# Altium PCB MagControl.PcbDoc (part 1 of 2)
Units mil, origin at the board's own origin, x right, y up, seen from the top; angles counter-clockwise.
Board outline 3700 x 2900 mil, 4 copper layers (Top Layer, Layer 1, Layer 2, Bottom Layer), stack 61.756 mil thick; 68 components, 51 nets, 337 pads, 112 vias.
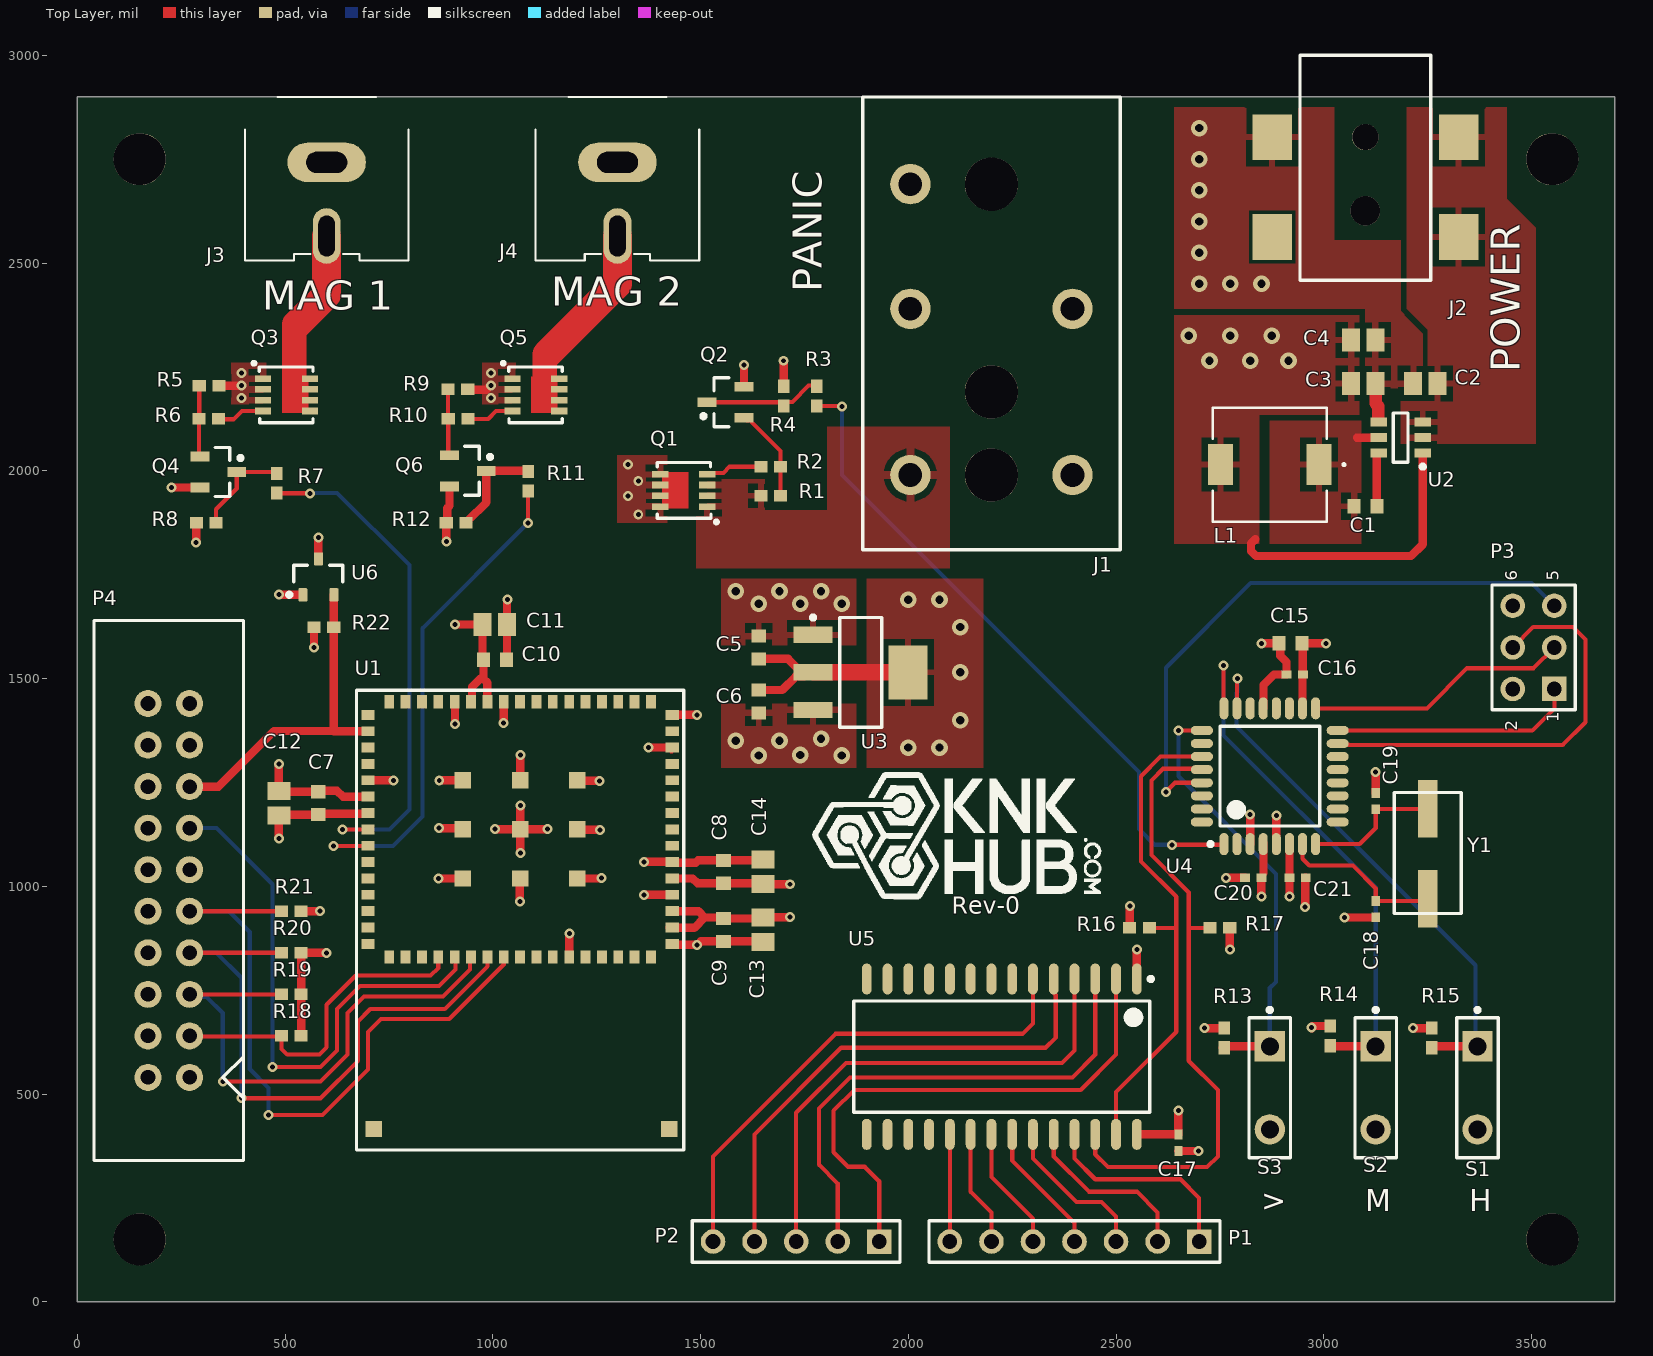
[diagram p0: Top Layer view]
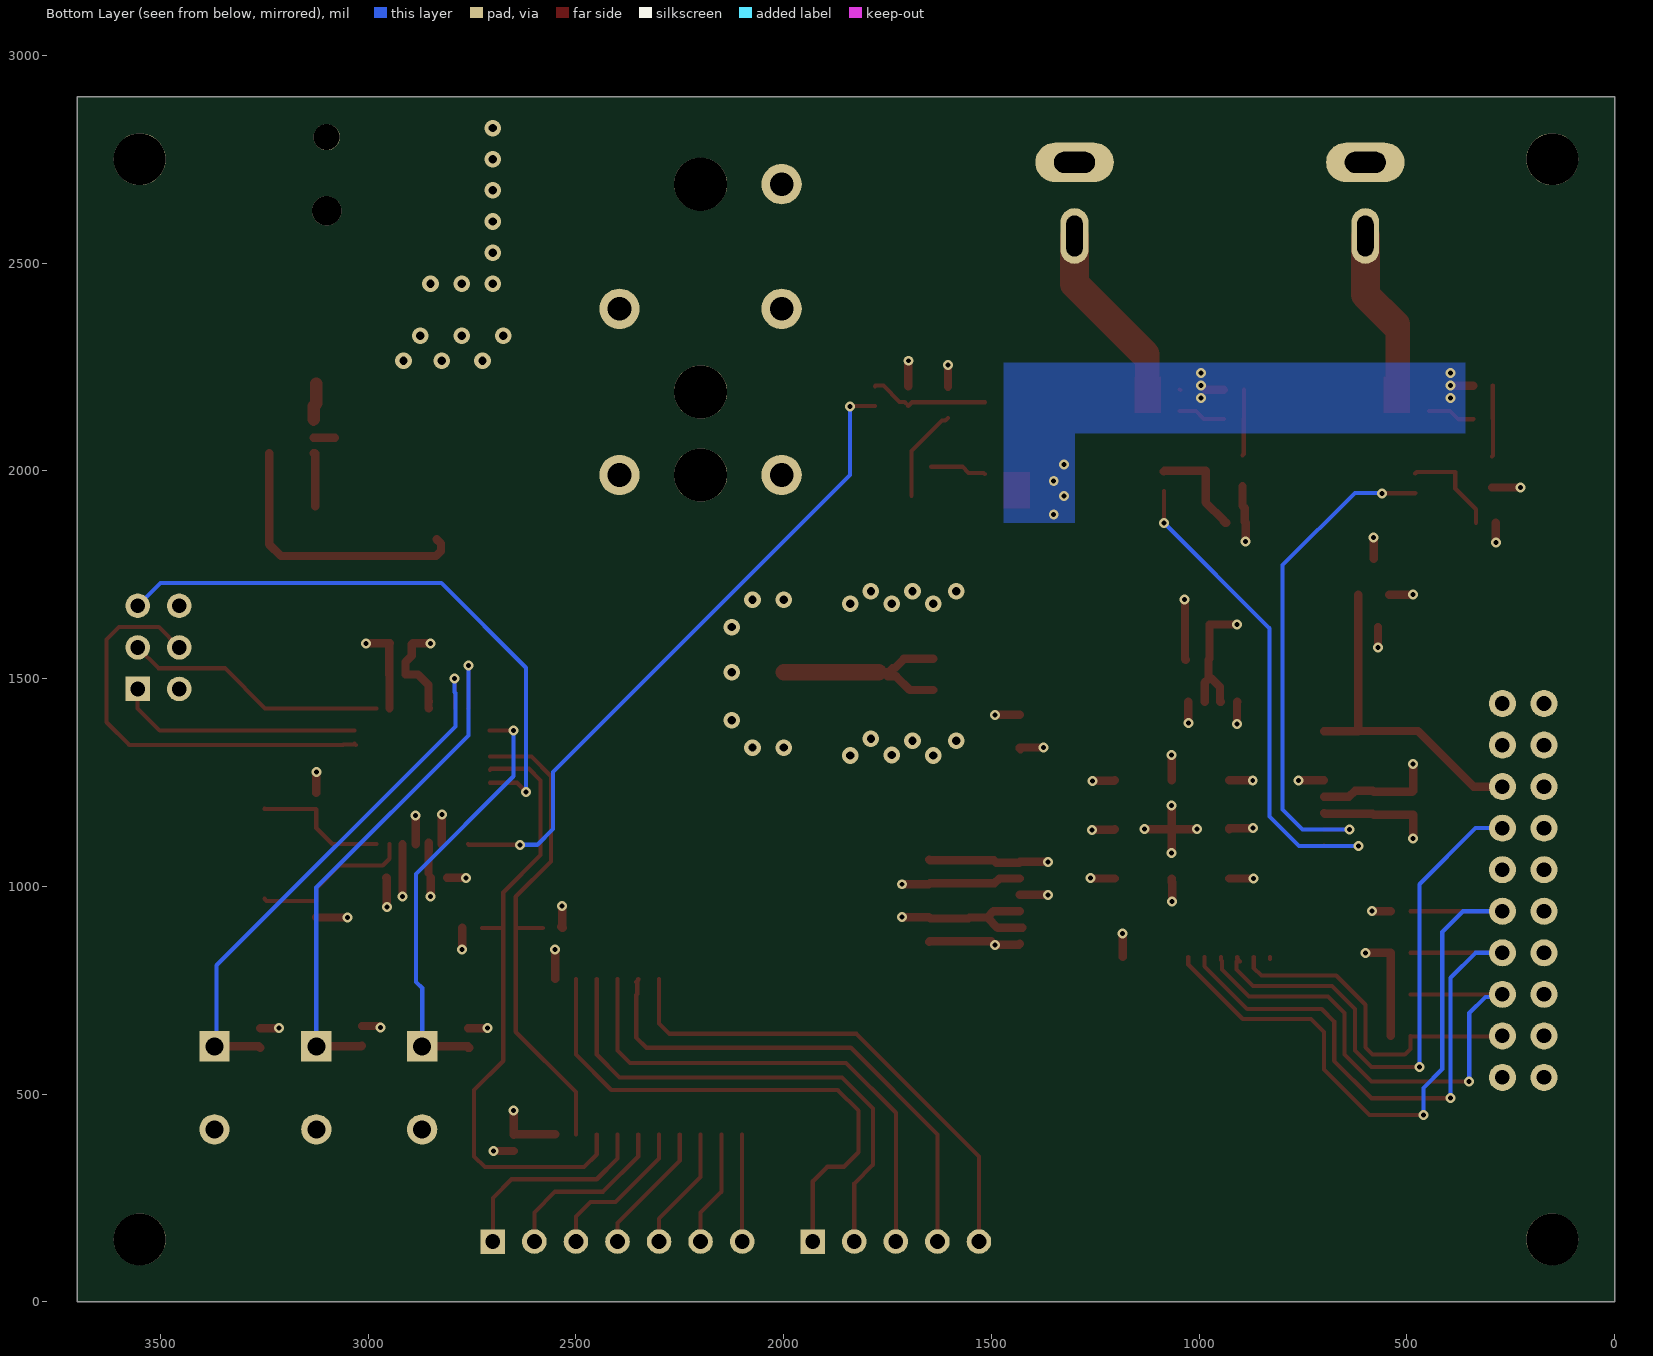
[diagram p1: Bottom Layer view, seen from below]
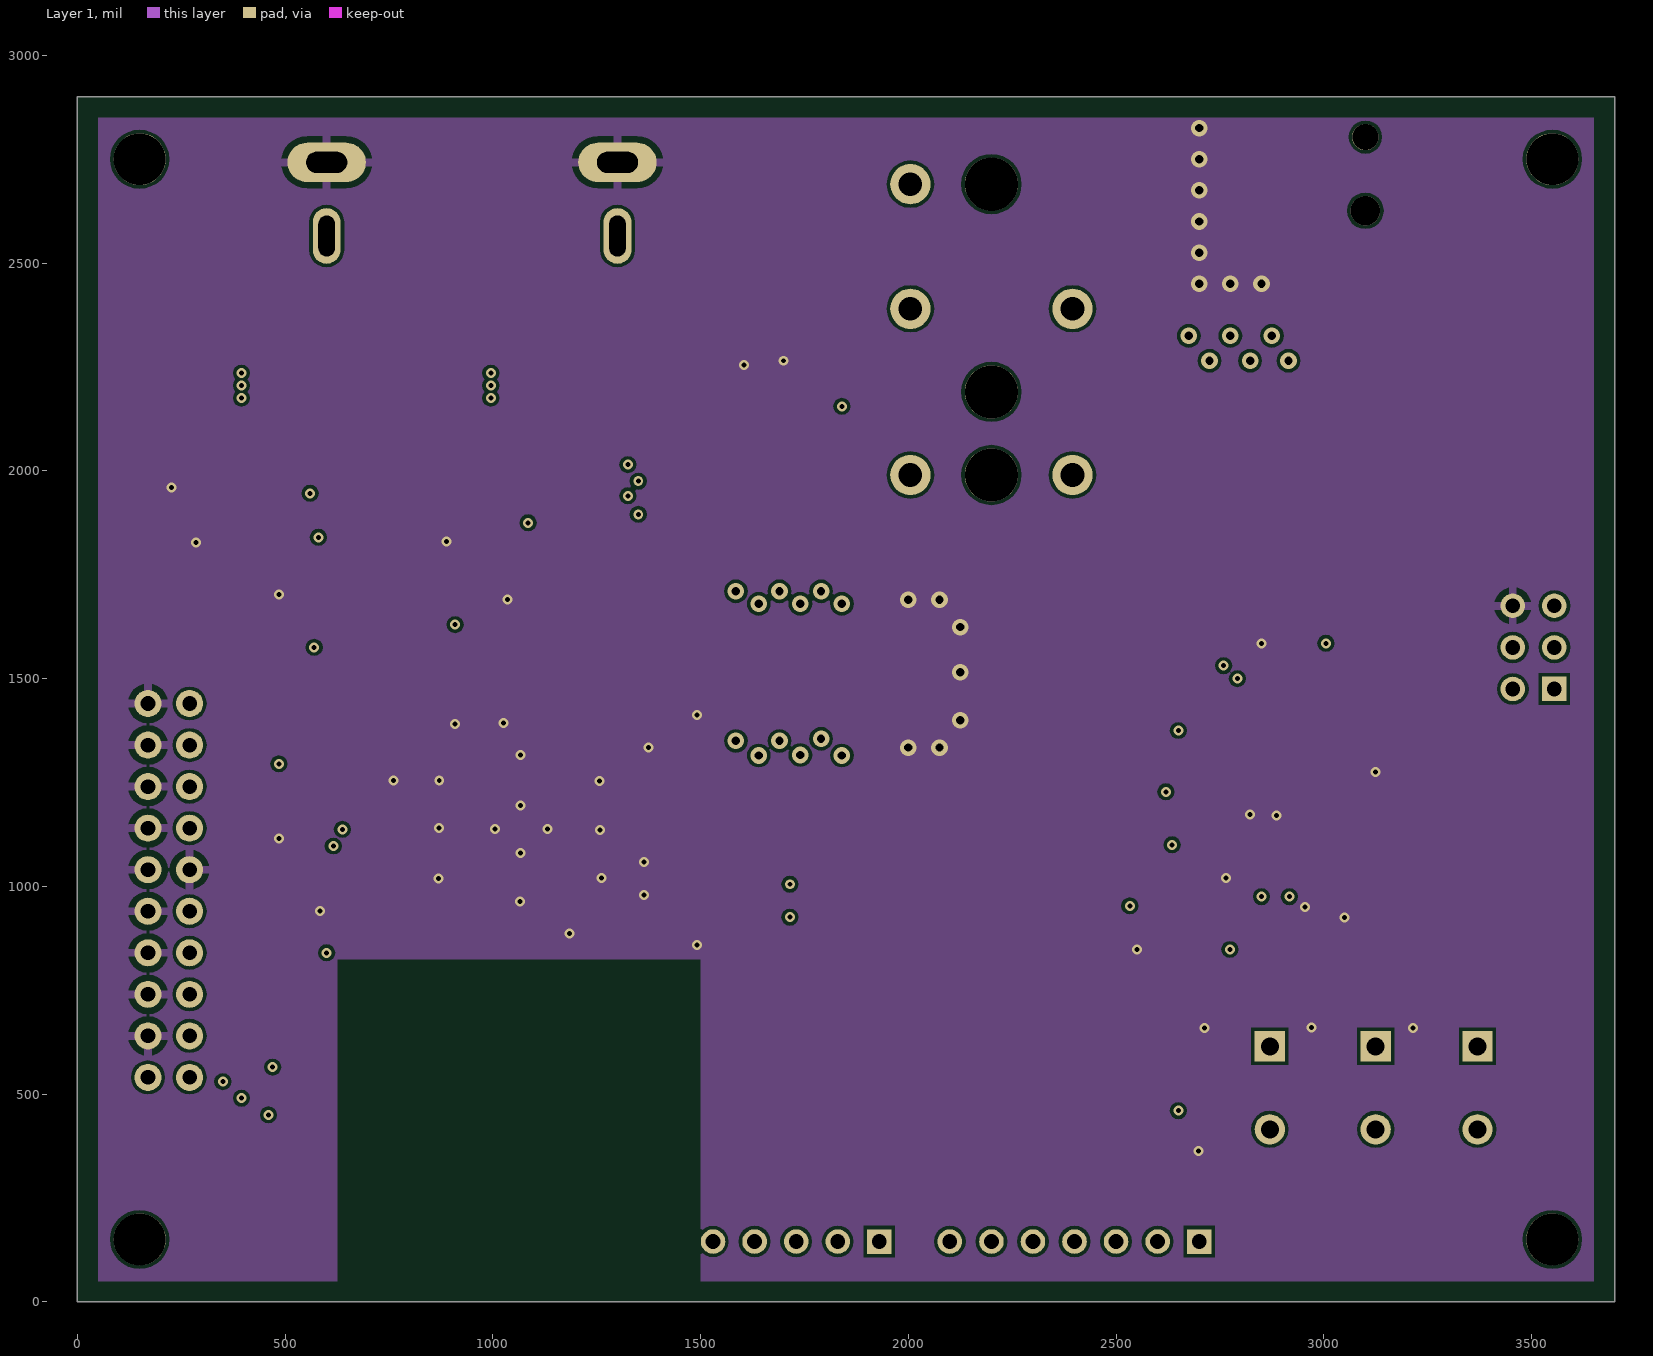
[diagram p2: Layer 1]
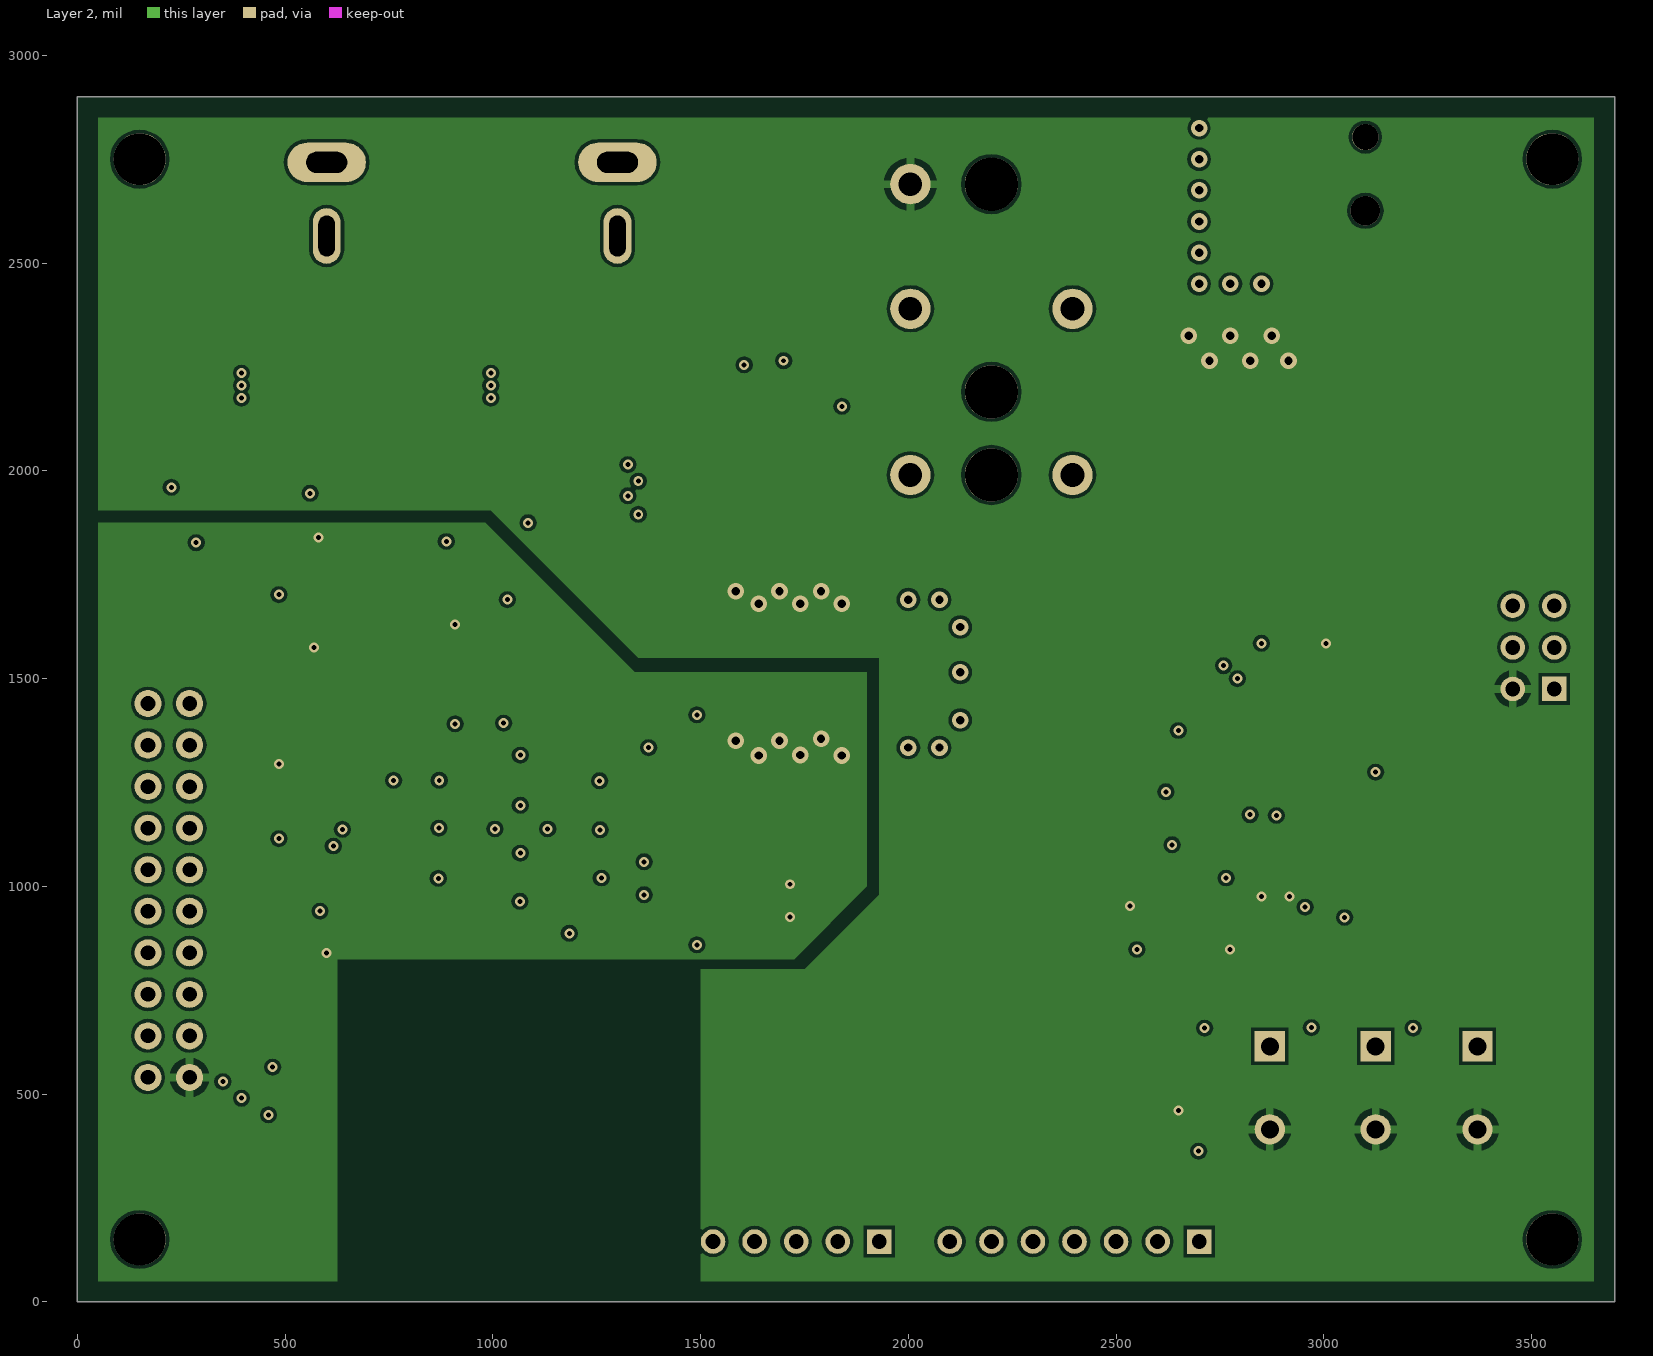
[diagram p3: Layer 2]
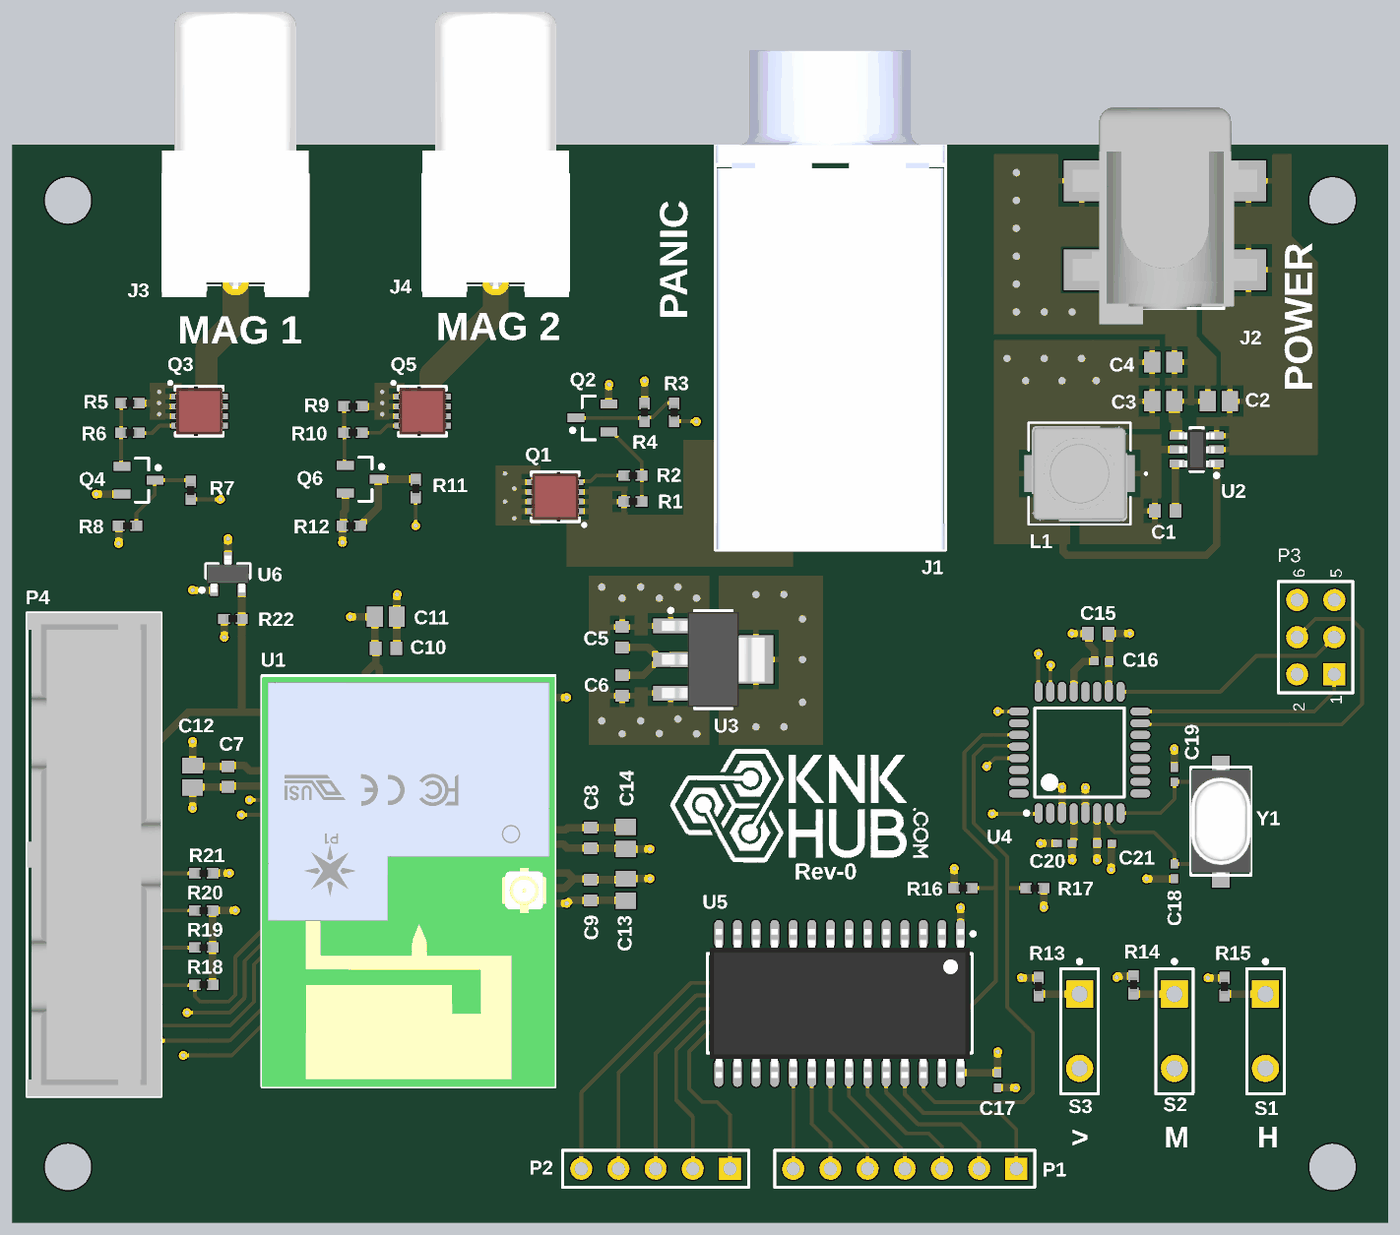
[diagram p4: 3D render of the assembled board from above, using the file's embedded part models]

## Layer stack, top to bottom
Top Solder: solder mask 0.4, Solder Resist, Dk 3.5
Top Layer: signal copper 1.4
Dielectric 2: prepreg 14, PP-006, Dk 4.1
Layer 1: signal copper 1.3779
Dielectric 1: dielectric 28.2, FR-4, Dk 4.8
Layer 2: signal copper 1.3779
Dielectric 3: prepreg 14, PP-006, Dk 4.1
Bottom Layer: signal copper 1.4
Bottom Solder: solder mask 0.4, Solder Resist, Dk 3.5

## Board outline
0,0 0,2900 3700,2900 3700,0

## Design rules (kind name [scope] priority, off if disabled: settings)
Clearance [All] p1: gap=8 ignorepadtopadclearanceinfootprint=FALSE except(0: Arc-Hole Track-Hole SMDPad-Hole THPad-Hole Via-Hole Fill-Hole Poly-Hole Region-Hole Text-Hole)
PlaneClearance [All] p1: clearance=30
PolygonConnect [All] p1: thpad.connectstyle=Relief thpad.reliefconductorwidth=20 thpad.reliefentries=4 thpad.polygonreliefangle="90 Angle" thpad.airgapwidth=15 smdpad.connectstyle=Relief smdpad.reliefconductorwidth=15 smdpad.reliefentries=4 smdpad.polygonreliefangle="90 Angle" smdpad.airgapwidth=15 via.connectstyle=Direct via.reliefconductorwidth=20 via.reliefentries=4 via.polygonreliefangle="90 Angle" via.airgapwidth=10
RoutingVias [All] p1: holewidth=12 width=24 viastyle="Through Hole" minholewidth=12 minwidth=24 maxholewidth=20 maxwidth=40
SolderMaskExpansion [All] p1: expansion=4
Width [All] p1: maxlimit=100 minlimit=10 preferedwidth=10
29 further rules are at their usual default settings.

## Classes and differential pairs
component class SCH_MagControl_Sheet2: C15 C16 C17 C18 C19 C20 C21 P1 P2 P3 R13 R14 R15 R16 R17 S1 S2 S3 U4 U5 Y1
component class SCH_MagControl_Sheet1: C1 C2 C3 C4 C5 C6 C7 C8 C9 C10 C11 C12 C13 C14 J1 J2 J3 J4 L1 P4 Q1 Q2 Q3 Q4 Q5 Q6 R1 R2 R3 R4 R5 R6 R7 R8 R9 R10 R11 R12 R18 R19 R20 R21 R22 U1 U2 U3 U6

## Components (designator, comment, footprint, x,y, rotation, side; value= is the part's Value field where it differs from the comment)
C1 "" CAPC1608L 3100,1915 r0 top value=100nF
C2 "" CAPC2012L 3244.53,2210 r0 top value=10uF
C3 "" CAPC2012L 3095,2210 r180 top value=10uF
C4 "" CAPC2012L 3095,2315 r180 top value=22uF
C5 "" CAPC1608L 1640,1575 r90 top value=10uF
C6 "" CAPC1608L 1640,1445 r270 top value=10uF
C7 "" CAPC1608L 580,1200 r90 top value=10uF
C8 "" CAPC1608L 1555,1035 r270 top value=10uF
C9 "" CAPC1608L 1555,895 r90 top value=10uF
C10 "" CAPC1608L 1005,1545 r180 top value=10uF
C11 "" CAPC2012L 1004.53,1630 r180 top value=0.1uF
C12 "" CAPC2012L 485,1200 r90 top value=0.1uF
C13 "" CAPC2012L 1650,895.47 r90 top value=0.1uF
C14 "" CAPC2012L 1650,1035 r270 top value=0.1uF
C15 "" CAPC1608L 2920,1585 r0 top value=10uF
C16 "" CAPC1005L 2930,1510 r0 top value=0.1uF
C17 "" CAPC1005L 2650,382.68 r90 top value=0.1uF
C18 "" CAPC1005L 3125,945.31 r90 top value=18pF
C19 "" CAPC1005L 3125,1205 r270 top value=18pF
C20 "" CAPC1005L 2830,1020.55 r0 top value=0.1uF
C21 "" CAPC1005L 2936.93,1020.55 r180 top value=0.1uF
J1 "" SN37A12 2200,2690 r90 top locked value=PHONO
J2 "" PJ-002B-SMT 2922.83,3000 r270 top locked
J3 "" CUI_RCJ-043 600,2900 r90 top locked value=RCJ-043
J4 "" CUI_RCJ-043 1300,2900 r90 top locked value=RCJ-043
L1 "" IND_BOURNS_SRR06 2870,2015 r180 top value=SRR0604-4R7ML
P1 "" HDR1X7 2700,145 r180 top locked
P2 "" HDR1X5 1930,145 r180 top locked
P3 "" HDR2X3 3555,1475 r90 top value="Header 3X2"
P4 "" C-5103308-5 270,540 r270 top locked value="Header 10x2"
Q1 "" "POWER-PAK 1212-8" 1516,1914 r180 top value=SQS423EN
Q2 "" SOT23_N 1560,2165 r180 top value=PMBT2222A
Q3 "" "POWER-PAK 1212-8" 447,2222 r0 top value=SQS423EN
Q4 "" SOT23_N 339.29,1997.4 r0 top value=PMBT2222A
Q5 "" "POWER-PAK 1212-8" 1047,2222 r0 top value=SQS423EN
Q6 "" SOT23_N 940,2000 r0 top value=PMBT2222A
R1 "" RESC1005N 1668.62,1940 r180 top value=10.0K
R2 "" RESC1005N 1668.62,2010 r180 top value=12.0K
R3 "" RESC1005N 1780,2180 r90 top value=1.00K
R4 "" RESC1005N 1700,2180 r270 top value=10.0K
R5 "" RESC1005N 317,2205 r0 top value=10.0K
R6 "" RESC1005N 316.38,2125 r0 top value=12.0K
R7 "" RESC1005N 480,1970 r90 top value=1.00K
R8 "" RESC1005N 310,1875 r0 top value=10.0K
R9 "" RESC1005N 916,2196 r0 top value=10.0K
R10 "" RESC1005N 916.38,2125 r0 top value=12.0K
R11 "" RESC1005N 1085,1975 r90 top value=1.00K
R12 "" RESC1005N 911.38,1875 r0 top value=10.0K
R13 "" RESC1005N 2760,635 r270 top value=10.0K
R14 "" RESC1005N 3015,640 r270 top value=10.0K
R15 "" RESC1005N 3260,635 r270 top value=10.0K
R16 "" RESC1005N 2556.38,900 r180 top value=10.0K
R17 "" RESC1005N 2750,900 r0 top value=10.0K
R18 "" RESC1005N 515,640 r0 top value=10.0K
R19 "" RESC1005N 515,740 r0 top value=10.0K
R20 "" RESC1005N 515,840 r0 top value=10.0K
R21 "" RESC1005N 515,940 r0 top value=10.0K
R22 "" RESC1005N 593.38,1624 r180 top value=10.0K
S1 "\"H\"" SPST-2 3370,515 r270 top
S2 "\"M\"" SPST-2 3125,515 r270 top
S3 "\">\"" SPST-2 2870,515 r270 top
U1 "" PARTICLE_P1 1431.77,861.5 r90 top value="Particle P1"
U2 "" TSOT26-6N 3185,2080 r180 top value=AP63205
U3 "" SOT223-4N 1885,1515 r0 top value=LM3940
U4 "" 32A_L 2870,1265 r90 top value=ATmega328P-AU
U5 "" SOP127P1030X264-28N 2225,590 r270 top value=HT16K33
U6 "" DBZ0003A_L 580,1745 r90 top value=TLV803SDBZR
Y1 "" CSM-3X 3250,1078.27 r90 top value=16MHz

## Footprints (in the part's own frame and the unit in brackets; to place one, negate y for a bottom-side part, rotate by r counter-clockwise, add the part's x,y. Pads: shape width x height; smd on the part's side, far side on the other; paste and mask are expansions set on the pad)
32A_L [mm] "Thin QFP, 32-Leads, Body 7x7mm, Pitch 0.8mm, IPC High Density"
  oval 1.35x0.55 smd: 1(-4.15,2.8) 2(-4.15,2) 3(-4.15,1.2) 4(-4.15,0.4) 5(-4.15,-0.4) 6(-4.15,-1.2) 7(-4.15,-2) 8(-4.15,-2.8) 17(4.15,-2.8) 18(4.15,-2) 19(4.15,-1.2) 20(4.15,-0.4) 21(4.15,0.4) 22(4.15,1.2) 23(4.15,2) 24(4.15,2.8)
  oval 0.55x1.35 smd: 9(-2.8,-4.15) 10(-2,-4.15) 11(-1.2,-4.15) 12(-0.4,-4.15) 13(0.4,-4.15) 14(1.2,-4.15) 15(2,-4.15) 16(2.8,-4.15) 25(2.8,4.15) 26(2,4.15) 27(1.2,4.15) 28(0.4,4.15) 29(-0.4,4.15) 30(-1.2,4.15) 31(-2,4.15) 32(-2.8,4.15)
  silkscreen extent -4.27,-3.05 3.05,3.75, body extent -3.5,-3.5 3.5,3.5, height 1.2
C-5103308-5 [mil] "CONN HEADER VERT 20POS 2.54MM"
  round 65 hole 35: 1(0,0) 2(0,-100) 3(-100,0) 4(-100,-100) 5(-200,0) 6(-200,-100) 7(-300,0) 8(-300,-100) 9(-400,0) 10(-400,-100) 11(-500,0) 12(-500,-100) 13(-600,0) 14(-600,-100) 15(-700,0) 16(-700,-100) 17(-800,0) 18(-800,-100) 19(-900,0) 20(-900,-100)
  silkscreen extent -1100,-230 200,130, body extent -1100,-230 200,130, height 388
CAPC1005L [mm] "Chip Capacitor, Body 1.0x0.5mm, IPC High Density"
  rect 0.6x0.5 smd: 1(-0.5,0) 2(0.5,0)
  body extent -0.55,-0.3 0.55,0.3, height 0.6
CAPC1608L [mm] "Chip Capacitor, Body 1.6x0.8mm, IPC High Density"
  rect 0.8x0.9 smd: 1(-0.7,0) 2(0.7,0)
  body extent -0.87,-0.48 0.87,0.48, height 0.85
CAPC2012L [mm] "Chip Capacitor, Body 2.0x1.3mm, IPC High Density"
  rect 1.1x1.4 smd: 1(-0.75,0) 2(0.75,0)
  body extent -1.1,-0.72 1.1,0.72, height 1.1
CSM-3X [mm]
  rect 3.5x1.2 smd: 1(-2.75,0) 2(2.75,0)
  silkscreen extent -3.64,-2.05 3.74,2.05, body extent -3.75,-2.05 3.85,2.05, height 2.3
CUI_RCJ-043 [mm]
  oval 2.4x4.8 hole 1.3 slot 2.5 at 90 deg: 1(-4,0)
  oval 3.4x1.7 hole 1 slot 2.5 at 0 deg: 2(-8.5,0)
  silkscreen extent -10,-5 0,5, body extent -10.41,-5 9.09,5, height 13.01
DBZ0003A_L [mm] "SOT23, 3-Leads, Body 3.04x1.4mm, Pitch 0.95mm, IPC High Density"
  rrect18% 0.8x0.55 smd: 1(-1.1,0.95) 2(-1.1,-0.95) 3(1.1,0)
  silkscreen extent -1.22,-1.5 0.7,1.9, body extent -1.26,-1.46 1.26,1.46, height 0.96
HDR1X5 [mm] "Connector; Header; 5 Position"
  rect 1.5x1.5 hole 0.9: 1(0,0)
  round 1.5 hole 0.9: 2(2.54,0) 3(5.08,0) 4(7.62,0) 5(10.16,0)
  silkscreen extent -1.27,-1.27 11.43,1.27
HDR1X7 [mm] "Connector; Header; 7 Position"
  rect 1.5x1.5 hole 0.9: 1(0,0)
  round 1.5 hole 0.9: 2(2.54,0) 3(5.08,0) 4(7.62,0) 5(10.16,0) 6(12.7,0) 7(15.24,0)
  silkscreen extent -1.27,-1.27 16.51,1.27
HDR2X3 [mm] "Connector; Header; 3x2 Position"
  rect 1.5x1.5 hole 0.9: 1(0,0)
  round 1.5 hole 0.9: 2(0,2.54) 3(2.54,0) 4(2.54,2.54) 5(5.08,0) 6(5.08,2.54)
  silkscreen extent -1.27,-1.27 6.35,3.81
IND_BOURNS_SRR06 [mil]
  rect 60x99 smd paste+0 mask+0: 1(-118.5,0) 2(118.5,0)
  silkscreen extent -182,-137 137,137, body extent -128,-128 128,128, height 182
PARTICLE_P1 [mm]
  rect 0.6x0.8 smd: 1(0,0) 2(1,0) 3(2,0) 4(3,0) 5(4,0) 6(5,0) 7(6,0) 8(7,0) 9(8,0) 10(9,0) 11(10,0) 12(11,0) 13(12,0) 14(13,0) 15(14,0) 33(14,18.6) 34(13,18.6) 35(12,18.6) 36(11,18.6) 37(10,18.6) 38(9,18.6) 39(8,18.6) 40(7,18.6) 41(6,18.6) 42(5,18.6) 43(4,18.6) 44(3,18.6) 45(2,18.6) 46(1,18.6) 47(0,18.6)
  rect 0.8x0.6 smd: 16(14.8,1.3) 17(14.8,2.3) 18(14.8,3.3) 19(14.8,4.3) 20(14.8,5.3) 21(14.8,6.3) 22(14.8,7.3) 23(14.8,8.3) 24(14.8,9.3) 25(14.8,10.3) 26(14.8,11.3) 27(14.8,12.3) 28(14.8,13.3) 29(14.8,14.3) 30(14.8,15.3) 31(14.8,16.3) 32(14.8,17.3) 48(-0.8,17.3) 49(-0.8,16.3) 50(-0.8,15.3) 51(-0.8,14.3) 52(-0.8,13.3) 53(-0.8,12.3) 54(-0.8,11.3) 55(-0.8,10.3) 56(-0.8,9.3) 57(-0.8,8.3) 58(-0.8,7.3) 59(-0.8,6.3) 60(-0.8,5.3) 61(-0.8,4.3) 62(-0.8,3.3) 63(-0.8,2.3) 64(-0.8,1.3)
  rect 1x1 smd: 65(4,5.8) 66(7,5.8) 67(10,5.8) 68(4,9.3) 69(7,9.3) 70(10,9.3) 71(4,12.8) 72(7,12.8) 73(10,12.8) 74(-11.32,18.24) 75(-11.32,0.18)
  silkscreen extent -12.6,-0.7 15.5,19.3, body extent -12.6,-0.7 15.4,19.3, height 2.06
PJ-002B-SMT [mm]
  rect 2.794x2.413 smd: 1(5,10.2) 1(11.1,10.2) 2(5,-1.2) 3(11.1,-1.2)
  round 1.6 hole 1.6 unplated: NP(5,4.5)
  round 1.8 hole 1.8 unplated: NP(9.5,4.5)
  silkscreen extent 0,0.5 13.75,8.5, body extent 0,-1.8 14.8,10.8, height 11.2
"POWER-PAK 1212-8" [mil]
  rect 39x16 smd: 1(0,0) 2(0,-26) 3(0,-52) 4(0,-78) 5(113,-78) 6(113,-52) 7(113,-26) 8(113,0)
  Top Layer region: 45,-83 109,-83 109,5 45,5
  silkscreen extent -25,-106 120,40, body extent -8,-106 120,28, height 44
RESC1005N [mm] "Chip Resistor, Body 1.1x0.5mm, IPC Medium Density"
  rect 0.8x0.7 smd: 1(-0.6,0) 2(0.6,0)
  body extent -0.55,-0.3 0.55,0.3, height 0.4
SN37A12 [mil] "CONN JACK MONO 6.35MM R/A"
  round 97 hole 57 unplated: R(-300,195) RB(-300,-195) S(0,195) T(-700,195) TB(-700,-195)
  round 128 hole 128 unplated: ""(-700,0) ""(-500,0) ""(0,0)
  silkscreen extent -880,-310 210,310, body extent -879,-308 463,308, height 604
SOP127P1030X264-28N [mm] "SOP, 28-Leads, Body 17.91x7.06mm, Pitch 1.27mm, IPC Medium Density"
  oval 1.9x0.6 smd: 1(-4.75,8.255) 2(-4.75,6.985) 3(-4.75,5.715) 4(-4.75,4.445) 5(-4.75,3.175) 6(-4.75,1.905) 7(-4.75,0.635) 8(-4.75,-0.635) 9(-4.75,-1.905) 10(-4.75,-3.175) 11(-4.75,-4.445) 12(-4.75,-5.715) 13(-4.75,-6.985) 14(-4.75,-8.255) 15(4.75,-8.255) 16(4.75,-6.985) 17(4.75,-5.715) 18(4.75,-4.445) 19(4.75,-3.175) 20(4.75,-1.905) 21(4.75,-0.635) 22(4.75,0.635) 23(4.75,1.905) 24(4.75,3.175) 25(4.75,4.445) 26(4.75,5.715) 27(4.75,6.985) 28(4.75,8.255)
  silkscreen extent -4.87,-9.05 3.4,9.23, body extent -5.1,-8.87 5.1,8.87, height 2.81
SOT23_N [mm] "SOT23, 3-Leads, Body 2.9x1.3mm, Pitch 0.95mm, Lead Span 2.3mm - Reverse Pinning, IPC Medium Density"
  rect 1.15x0.6 smd: 1(1.125,0) 2(-1.125,-0.95) 3(-1.125,0.95)
  silkscreen extent -0.2,-1.5 1.47,1.5, body extent -0.7,-1.5 0.7,1.5, height 1.1
SOT223-4N [mm] "SOT223, 4-Leads, Body 6.5x3.5mm, Pitch 2.3mm, Lead Span 7mm, IPC Medium Density"
  rect 2.4x1 smd: 1(-2.9,2.3) 2(-2.9,0) 3(-2.9,-2.3)
  rect 2.4x3.3 smd: 4(2.9,0)
  silkscreen extent -3.02,-3.35 1.29,3.47, body extent -3.5,-3.25 3.5,3.25, height 1.64
SPST-2 [mm] "Switch; 2 Leads"
  rect 1.85x1.85 hole 1.1: 1(-2.54,0)
  round 1.85 hole 1.1: 2(2.54,0)
  silkscreen extent -4.89,-1.27 4.28,1.27
TSOT26-6N [mm] "TSOT26 6-Leads, Body 2.90x2.80mm, Pitch 0.95mm, IPC Medium Density"
  rect 1x0.55 smd: 1(-1.35,0.95) 2(-1.35,0) 3(-1.35,-0.95) 4(1.35,-0.95) 5(1.35,0) 6(1.35,0.95)
  silkscreen extent -1.48,-1.5 0.45,1.9, body extent -1.21,-1.38 1.21,1.42, height 1.09

## Part data
C1: library part "Cap Semi", "Capacitor (SMD)", Capacitance=100nF, Case/Package=0603, Case Code (Metric)=1608, Dielectric=X7R, Manufacturer 1=Samsung, Manufacturer Part Number 1=CL10B104KO8NNNC, Max Operating Temperature=125°C, Min Operating Temperature=-55°C, Package Quantity=1, Supplier Part Number 1=1276-1005-1-ND, Tolerance=10%, voltage=16V, Case Code (Imperial)=0603, ComponentLink1Description=https://datasheet.ciiva.com/26838/getdatasheetpartid-357417-26838418.pdf?src-supplier=Verical, ComponentLink1URL=https://datasheet.ciiva.com/26838/getdatasheetpartid-357417-26838418.pdf?src-supplier=Verical, ComponentLink2Description=https://datasheet.ciiva.com/25805/cl10b104ko8nnnc-25805483.pdf?src-supplier=Digi-Key, ComponentLink2URL=https://datasheet.ciiva.com/25805/cl10b104ko8nnnc-25805483.pdf?src-supplier=Digi-Key, ComponentLink3Description=https://datasheet.ciiva.com/29198/456679-da-01-en-vs-kondensator-0603-29198846.pdf?src-supplier=Conrad, ComponentLink3URL=https://datasheet.ciiva.com/29198/456679-da-01-en-vs-kondensator-0603-29198846.pdf?src-supplier=Conrad, Contact Plating=Tin, Depth=0.8mm, Height=0.8mm, Lead Free="Lead Free", Length=1.6mm, Material=Ceramic, Mount="Surface Mount", Packaging="Tape and Reel", Radiation Hardening=No, Supplier 1=Digi-Key, Thickness=0.035inch, Voltage Rating=16V, Voltage Rating (DC)=16V, Width=0.031inch
C2 C3: library part "Cap Semi", "Capacitor (SMD)", Capacitance=10uF, Case/Package=0805, Case Code (Metric)=2012, Dielectric=X5R, Manufacturer 1=Samsung, Manufacturer Part Number 1=CL21A106KOQNNNG, Max Operating Temperature=85°C, Min Operating Temperature=-55°C, Package Quantity=3000, Supplier Part Number 1=1276-6455-6-ND, Tolerance=10%, voltage=16V, Case Code (Imperial)=0805, ComponentLink1Description=https://datasheet.ciiva.com/16428/cl21a106kpfnnng-16428896.pdf?src-supplier=Future+Electronics, ComponentLink1URL=https://datasheet.ciiva.com/16428/cl21a106kpfnnng-16428896.pdf?src-supplier=Future+Electronics, ComponentLink2Description=https://datasheet.ciiva.com/26936/getdatasheetpartid-640497-26936900.pdf?src-supplier=Verical, ComponentLink2URL=https://datasheet.ciiva.com/26936/getdatasheetpartid-640497-26936900.pdf?src-supplier=Verical, ComponentLink3Description=https://datasheet.ciiva.com/25730/cl21a106koqnnng-25730226.pdf?src-supplier=Digi-Key, ComponentLink3URL=https://datasheet.ciiva.com/25730/cl21a106koqnnng-25730226.pdf?src-supplier=Digi-Key, ComponentLink4Description=https://datasheet.ciiva.com/29199/454932-da-01-en-vs-kondensator-0805-29199423.pdf?src-supplier=Conrad, ComponentLink4URL=https://datasheet.ciiva.com/29199/454932-da-01-en-vs-kondensator-0805-29199423.pdf?src-supplier=Conrad, Depth=1.25mm, Height=1.25mm, Length=2mm, Material=Ceramic, Mount="Surface Mount", Packaging="Tape and Reel", Supplier 1=Digi-Key, Thickness=0.053inch, Voltage Rating=16V, Width=0.049inch
C4: library part "Cap Semi", "Capacitor (SMD)", Capacitance=22uF, Case/Package=0805, Case Code (Metric)=2012, Manufacturer 1=Samsung, Manufacturer Part Number 1=CL21A226KQCLRNC, Max Operating Temperature=85°C, Min Operating Temperature=-55°C, Supplier Part Number 1=1276-6687-1-ND, Tolerance=10%, Voltage Rating=6.3V, Case Code (Imperial)=0805, ComponentLink1Description=http://www.samsungsem.com/kr/support/product-search/mlcc/CL21A226KQCLRNC.jsp?src-supplier=Digi-Key, ComponentLink1URL=http://www.samsungsem.com/kr/support/product-search/mlcc/CL21A226KQCLRNC.jsp?src-supplier=Digi-Key, Length=0.079inch, Mount="Surface Mount", Packaging="Tape and Reel", Supplier 1=Digi-Key, Thickness=0.037inch, Width=0.049inch
C5 C6 C7 C8 C9 C10 C15: library part "Cap Semi", "Capacitor (SMD)", Capacitance=10uF, Case/Package=0603, Case Code (Metric)=1608, Dielectric=X5R, Manufacturer 1=Samsung, Manufacturer Part Number 1=CL10A106MQ8NNNC, Max Operating Temperature=85°C, Min Operating Temperature=-55°C, Package Quantity=1, Supplier Part Number 1=1276-1119-1-ND, Tolerance=20%, voltage=6.3V, Case Code (Imperial)=0603, ComponentLink1Description=https://datasheet.ciiva.com/25798/cl10a106mq8nnnc-25798320.pdf?src-supplier=Digi-Key, ComponentLink1URL=https://datasheet.ciiva.com/25798/cl10a106mq8nnnc-25798320.pdf?src-supplier=Digi-Key, ComponentLink2Description=https://datasheet.ciiva.com/26838/getdatasheetpartid-357557-26838347.pdf?src-supplier=Verical, ComponentLink2URL=https://datasheet.ciiva.com/26838/getdatasheetpartid-357557-26838347.pdf?src-supplier=Verical, ComponentLink3Description=https://datasheet.ciiva.com/16437/cl05b104kq5nnnc-16437327.pdf?src-supplier=Future+Electronics, ComponentLink3URL=https://datasheet.ciiva.com/16437/cl05b104kq5nnnc-16437327.pdf?src-supplier=Future+Electronics, ComponentLink4Description=http://www.samsungsem.com/kr/support/product-search/mlcc/CL10X106MO8NRNC.jsp?src-supplier=Digi-Key, ComponentLink4URL=http://www.samsungsem.com/kr/support/product-search/mlcc/CL10X106MO8NRNC.jsp?src-supplier=Digi-Key, Contact Plating=Tin, Depth=0.8mm, Height=0.8mm, Length=1.6mm, Mount="Surface Mount", Packaging="Tape and Reel", Radiation Hardening=No, Supplier 1=Digi-Key, Thickness=0.035inch, Voltage Rating=6.3V, Width=0.031inch
C11 C12 C13 C14 C16 C17 C20 C21: library part "Cap Semi", "Capacitor (SMD)", Capacitance=100nF, Case/Package=0402, Case Code (Metric)=1005, Dielectric=X5R, Manufacturer 1=Samsung, Manufacturer Part Number 1=CL05A104MP5NNNC, Max Operating Temperature=85°C, Min Operating Temperature=-55°C, Supplier Part Number 1=1276-1443-1-ND, Tolerance=20%, Voltage Rating=10V, Case Code (Imperial)=0402, ComponentLink1Description=https://datasheet.ciiva.com/25709/cl05a104mp5nnnc-25709105.pdf?src-supplier=Digi-Key, ComponentLink1URL=https://datasheet.ciiva.com/25709/cl05a104mp5nnnc-25709105.pdf?src-supplier=Digi-Key, Depth=0.5mm, Height=0.5mm, Lead Free="Lead Free", Length=1mm, Mount="Surface Mount", Packaging="Tape and Reel", Radiation Hardening=No, Supplier 1=Digi-Key, Thickness=0.022inch, Voltage Rating (DC)=10V, Width=0.02inch
C18 C19: library part "Cap Semi", "Capacitor (SMD)", Capacitance=18pF, Case/Package=0402, Case Code (Metric)=1005, Dielectric=C0G, Manufacturer 1=Yageo, Manufacturer Part Number 1=CC0402JRNPO9BN180, Max Operating Temperature=125°C, Min Operating Temperature=-55°C, Package Quantity=1, Supplier Part Number 1=311-1415-1-ND, Temperature Coefficient=30ppm/°C, Tolerance=5%, voltage=50V, Case Code (Imperial)=0402, ComponentLink1Description=https://datasheet.ciiva.com/11788/0900766b80d84fbf-11788369.pdf?src-supplier=RSComponents, ComponentLink1URL=https://datasheet.ciiva.com/11788/0900766b80d84fbf-11788369.pdf?src-supplier=RSComponents, ComponentLink2Description=https://datasheet.ciiva.com/176/mlccorderingcode-176357.pdf?src-supplier=Digi-Key, ComponentLink2URL=https://datasheet.ciiva.com/176/mlccorderingcode-176357.pdf?src-supplier=Digi-Key, ComponentLink3Description=https://datasheet.ciiva.com/176/mlccorderingcode-176358.pdf?src-supplier=Digi-Key, ComponentLink3URL=https://datasheet.ciiva.com/176/mlccorderingcode-176358.pdf?src-supplier=Digi-Key, ComponentLink4Description=https://datasheet.ciiva.com/176/mlccorderingcode-176359.pdf?src-supplier=Digi-Key, ComponentLink4URL=https://datasheet.ciiva.com/176/mlccorderingcode-176359.pdf?src-supplier=Digi-Key, ComponentLink5Description=https://datasheet.ciiva.com/28450/1443161-28450232.pdf?src-supplier=Element14, ComponentLink5URL=https://datasheet.ciiva.com/28450/1443161-28450232.pdf?src-supplier=Element14, ComponentLink6Description=https://datasheet.ciiva.com/13208/upy-gp-np0-16v-to-50v-8-13208430.pdf?src-supplier=Mouser, ComponentLink6URL=https://datasheet.ciiva.com/13208/upy-gp-np0-16v-to-50v-8-13208430.pdf?src-supplier=Mouser, ComponentLink7Description=https://datasheet.ciiva.com/11587/upy-gp-np0-16v-to-50v-8-11587087.pdf?src-supplier=Avnet, ComponentLink7URL=https://datasheet.ciiva.com/11587/upy-gp-np0-16v-to-50v-8-11587087.pdf?src-supplier=Avnet, Composition=Ceramic, Depth=0.5mm, Height=0.5mm, LatestRevisionDate=29-May-2009, LatestRevisionNote="IPC-7351 Footprint Added.", Lead Free="Lead Free", Length=1mm, Mount="Surface Mount", Number of Pins=2, PackageDescription="Chip Capacitor", PackageReference=C1206, Packaging="Tape and Reel", Published=8-Jun-2000, Publisher="Altium Limited", Radiation Hardening=No, REACH SVHC="No SVHC", Supplier 1=Digi-Key, Termination=SMD/SMT, Thickness=0.022inch, Voltage Rating=50V, Voltage Rating (DC)=50V, Weight=2.3E-05oz, Width=0.02inch
J1: library part PHONO_250, Color=Black, Manufacturer 1=Switchcraft, Manufacturer Part Number 1=SN37A12A, Package Quantity=1, Supplier Part Number 1=SC2014-ND, Voltage Rating=500V, ComponentLink1Description=https://datasheet.ciiva.com/390/sn37a1-cd-390736.pdf?src-supplier=Digi-Key, ComponentLink1URL=https://datasheet.ciiva.com/390/sn37a1-cd-390736.pdf?src-supplier=Digi-Key, ComponentLink2Description=https://datasheet.ciiva.com/16148/jack-95-16148456.pdf?src-supplier=Onlinecomponents.com, ComponentLink2URL=https://datasheet.ciiva.com/16148/jack-95-16148456.pdf?src-supplier=Onlinecomponents.com, Contact Material=Brass, Contact Plating=Nickel, Gender=Female, Housing Color=Black, Housing Material=Thermoplastic, Lead Free="Lead Free", Length=15.87mm, Mount="Through Hole", Number of Contacts=2, Number of Ports=1, Number of Positions=2, Number of Terminals=4, Orientation="Right Angle", Pitch=7.62mm, Shielding=Unshielded, Supplier 1=Digi-Key, Termination=Solder
J2: library part PWR2.5, "Low Voltage Power Supply Connector", Color=Black, Current Rating=5A, Flammability Rating="UL94 V-0", Insulation Resistance=100MR, Manufacturer 1=CUI, Manufacturer Part Number 1=PJ-002BH, Max Operating Temperature=85°C, Min Operating Temperature=-25°C, Package Quantity=500, Supplier Part Number 1=CP-002BH-ND, Voltage Rating=24V, ComponentLink1Description=http://www.mouser.com/ds/2/670/pj-002bh-528069.pdf?src-supplier=Mouser, ComponentLink1URL=http://www.mouser.com/ds/2/670/pj-002bh-528069.pdf?src-supplier=Mouser, ComponentLink2Description=http://www.cui.com/Product/Resource/FuturePDF/PJ-002BH.pdf?src-supplier=Future+Electronics, ComponentLink2URL=http://www.cui.com/Product/Resource/FuturePDF/PJ-002BH.pdf?src-supplier=Future+Electronics, ComponentLink3Description=https://www.cui.com/product/resource/digikeypdf/pj-002bh.pdf?src-supplier=Digi-Key, ComponentLink3URL=https://www.cui.com/product/resource/digikeypdf/pj-002bh.pdf?src-supplier=Digi-Key, Connector Type=Jack, Contact Gender=Male, Contact Material=Copper, Contact Plating=Nickel, Diameter=2.5mm, Gender=Male, Housing Color=Black, Housing Material=Thermoplastic, Lead Free="Lead Free", Mount="Through Hole", Number of Conductors=2, Orientation=Horizontal, Packaging=Bulk, Shielding=Unshielded, Supplier 1=Digi-Key, Termination="Through Hole"
J3 J4: library part RCJ-043, "CONN RCA JACK MONO 3.2MM R/A", Color=White, Manufacturer 1=CUI, Supplier Part Number 1=CP-1420-ND, Body Material=Brass, ComponentLink1Description=https://www.cui.com/product/resource/digikeypdf/rcj-04x.pdf?src-supplier=Digi-Key, ComponentLink1URL=https://www.cui.com/product/resource/digikeypdf/rcj-04x.pdf?src-supplier=Digi-Key, Connector Type=Jack, Contact Plating=Nickel, Gender=Female, Insulation Color=White, Lead Free="Lead Free", Manufacturer Part Number 1=RCJ-043, Mount="Through Hole", Number of Ports=1, Orientation=Horizontal, Packaging=Bulk, Shielding=Unshielded, Supplier 1=Digi-Key, Termination=Solder
L1: library part Inductor, "Inductor", Case/Package=Nonstandard, Current Rating=2A, DC Resistance (DCR)=60mR, Frequency=50MHz, Inductance=4.7uH, Inductance Tolerance=20%, Manufacturer 1=Bourns, Manufacturer Part Number 1=SRR0604-4R7ML, Max Operating Temperature=125°C, Min Operating Temperature=-40°C, Package Quantity=1, Resistance=60MR, Saturation Current=2.55A, Supplier Part Number 1=SRR0604-4R7MLCT-ND, Test Frequency=1kHz, ComponentLink1Description=https://datasheet.ciiva.com/7849/1723201-7849753.pdf?src-supplier=Element14, ComponentLink1URL=https://datasheet.ciiva.com/7849/1723201-7849753.pdf?src-supplier=Element14, ComponentLink2Description=https://datasheet.ciiva.com/30139/srr0604-30139818.pdf?src-supplier=Onlinecomponents.com, ComponentLink2URL=https://datasheet.ciiva.com/30139/srr0604-30139818.pdf?src-supplier=Onlinecomponents.com, ComponentLink3Description=https://datasheet.ciiva.com/1062/srr0604-1062306.pdf?src-supplier=Digi-Key, ComponentLink3URL=https://datasheet.ciiva.com/1062/srr0604-1062306.pdf?src-supplier=Digi-Key, ComponentLink4Description=https://datasheet.ciiva.com/8517/srr0604-8517206.pdf?src-supplier=Avnet, ComponentLink4URL=https://datasheet.ciiva.com/8517/srr0604-8517206.pdf?src-supplier=Avnet, ComponentLink5Description=https://datasheet.ciiva.com/7849/1483755-7849754.pdf?src-supplier=Element14, ComponentLink5URL=https://datasheet.ciiva.com/7849/1483755-7849754.pdf?src-supplier=Element14, ComponentLink6Description=https://datasheet.ciiva.com/17247/srr0604-17247630.pdf?src-supplier=Avnet+Europe, ComponentLink6URL=https://datasheet.ciiva.com/17247/srr0604-17247630.pdf?src-supplier=Avnet+Europe, Composition=Wirewound, Core Material=Ferrite, DC Current=2A, Depth=6.7mm, Height=4.8mm, Height - Seated (Max)=0.189inch, Length=6.5mm, Material=Steel, Max DC Current=2A, Military Standard=Not, Mount="Surface Mount", Number of Pins=2, Packaging="Tape and Reel", Q Factor=10, REACH SVHC="No SVHC", RMS Current (Irms)=2A, Self Resonant Frequency=50MHz, Shielding=Shielded, Supplier 1=Digi-Key, Termination=SMD/SMT, Tolerance=20%, Width=6.5mm
P1: library part "Header 7", "Header, 7-Pin", Color=Black, Manufacturer 1="Wurth Electronics", Manufacturer Part Number 1=61300711121, Supplier Part Number 1=732-5320-ND, ComponentLink1Description=https://katalog.we-online.de/em/datasheet/6130xx11121.pdf?src-supplier=Digi-Key, ComponentLink1URL=https://katalog.we-online.de/em/datasheet/6130xx11121.pdf?src-supplier=Digi-Key, Connector Type="Male Pin", Contact Material=Copper, Contact Mating Length=0.236inch, Contact Plating=Gold, Gender=Male, LatestRevisionDate=17-Jul-2002, LatestRevisionNote="Re-released for DXP Platform.", Mount="Through Hole", Number of Contacts=7, Number of Positions=7, Number of Rows=1, Packaging=Bulk, Pitch=0.1inch, Publisher="Altium Limited", REACH SVHC=Unknown, Supplier 1=Digi-Key, Termination=Solder
P2: library part "Header 5", "Header, 5-Pin", Color=Black, Manufacturer 1="Wurth Electronics", Manufacturer Part Number 1=61300511121, Supplier Part Number 1=732-5318-ND, ComponentLink1Description=https://katalog.we-online.de/em/datasheet/6130xx11121.pdf?src-supplier=Digi-Key, ComponentLink1URL=https://katalog.we-online.de/em/datasheet/6130xx11121.pdf?src-supplier=Digi-Key, ComponentLink2Description=http://www.farnell.com/cad/1737268.pdf?src-supplier=Element14, ComponentLink2URL=http://www.farnell.com/cad/1737268.pdf?src-supplier=Element14, Connector Type="Male Pin", Contact Material=Copper, Contact Mating Length=0.236inch, Contact Plating=Gold, Gender=Male, LatestRevisionDate=17-Jul-2002, LatestRevisionNote="Re-released for DXP Platform.", Lead Free="Lead Free", Mount="Through Hole", Number of Contacts=5, Number of Positions=5, Number of Rows=1, Packaging=Bulk, Pitch=0.1inch, Publisher="Altium Limited", REACH SVHC=Unknown, Supplier 1=Digi-Key, Termination=Solder
P3: library part "Header 3X2", "Header, 3-Pin, Dual row", Color=Black, Contact Resistance=25mR, Current Rating=3A, Insulation Resistance=10GR, Manufacturer 1=Harwin, Manufacturer Part Number 1=M20-9980345, Max Operating Temperature=105°C, Min Operating Temperature=-40°C, Package Quantity=1000, Supplier Part Number 1=952-2120-ND, ComponentLink1Description=https://datasheet.ciiva.com/6789/91635-6789923.pdf?src-supplier=Newark, ComponentLink1URL=https://datasheet.ciiva.com/6789/91635-6789923.pdf?src-supplier=Newark, ComponentLink2Description=https://datasheet.ciiva.com/11746/0900766b80da602b-11746662.pdf?src-supplier=RSComponents, ComponentLink2URL=https://datasheet.ciiva.com/11746/0900766b80da602b-11746662.pdf?src-supplier=RSComponents, ComponentLink3Description=https://datasheet.ciiva.com/26852/getdatasheetpartid-420465-26852189.pdf?src-supplier=Verical, ComponentLink3URL=https://datasheet.ciiva.com/26852/getdatasheetpartid-420465-26852189.pdf?src-supplier=Verical, ComponentLink4Description=https://datasheet.ciiva.com/6830/m20-998-6830775.pdf?src-supplier=Digi-Key, ComponentLink4URL=https://datasheet.ciiva.com/6830/m20-998-6830775.pdf?src-supplier=Digi-Key, ComponentLink5Description=https://datasheet.ciiva.com/8046/112195-8046904.pdf?src-supplier=Element14, ComponentLink5URL=https://datasheet.ciiva.com/8046/112195-8046904.pdf?src-supplier=Element14, Connector Type="Male Pin", Contact Material=Brass, Contact Mating Length=0.24inch, Contact Plating=Gold, Depth=5.08mm, Gender=Male, Height=0.125inch, Housing Color=Black, Housing Material=Nylon, Insulation Material=Polyester, LatestRevisionDate=17-Jul-2002, LatestRevisionNote="Re-released for DXP Platform.", Length=7.62mm, Max Current Rating=3A, Mount="Through Hole", Number of Contacts=6, Number of Positions=6, Number of Rows=2, Orientation=Straight, Packaging=Bag, Pitch=2.54mm, Publisher="Altium Limited", Radiation Hardening=No, REACH SVHC="No SVHC", Row Spacing=0.1inch, Supplier 1=Digi-Key, Termination=Solder, Weight=0.125lb, Width=0.25inch
P4: library part HEADER10X2, Color=Black, Contact Current Rating=1A, Flammability Rating="UL94 V-0", Insulation Resistance=5GR, Manufacturer 1="TE Connectivity", Manufacturer Part Number 1=51033085, Max Operating Temperature=105°C, Max Voltage Rating (AC)=250V, Min Operating Temperature=-65°C, Package Quantity=35, Supplier Part Number 1=A33165-ND, Board Standoff="No (Without)", ComponentLink1Description=https://datasheet.ciiva.com/11750/0900766b804f3401-11750371.pdf?src-supplier=RSComponents, ComponentLink1URL=https://datasheet.ciiva.com/11750/0900766b804f3401-11750371.pdf?src-supplier=RSComponents, ComponentLink2Description=https://datasheet.ciiva.com/19463/753539-19463412.pdf?src-supplier=Jameco, ComponentLink2URL=https://datasheet.ciiva.com/19463/753539-19463412.pdf?src-supplier=Jameco, ComponentLink3Description=https://datasheet.ciiva.com/30233/eng-ds-1307819-ampmodu-0811-30233221.pdf?src-supplier=Onlinecomponents.com, ComponentLink3URL=https://datasheet.ciiva.com/30233/eng-ds-1307819-ampmodu-0811-30233221.pdf?src-supplier=Onlinecomponents.com, ComponentLink4Description=https://datasheet.ciiva.com/14638/70042631-14638263.pdf?src-supplier=Allied+Electronics, ComponentLink4URL=https://datasheet.ciiva.com/14638/70042631-14638263.pdf?src-supplier=Allied+Electronics, ComponentLink5Description=https://datasheet.ciiva.com/710/eng-cd-5103308-e-710220.pdf?src-supplier=Digi-Key, ComponentLink5URL=https://datasheet.ciiva.com/710/eng-cd-5103308-e-710220.pdf?src-supplier=Digi-Key, Connector System=Wire-to-Board, Connector Type=Plug, Contact Gender=Male, Contact Material="Copper Alloy", Contact Mating Length=0.24inch, Contact Plating=Gold, Contact Post Length=0.12inch, Contact Shape=Square, Current Rating=1A, Depth=9.14mm, Height=8.813mm, Housing Color=Black, Housing Material=PBT, Length=33.02mm, Mating Alignment="Yes (With)", Mating Connector Lock="No (Without)", Mating Retention="No (Without)", Mount="Through Hole", Number of Contacts=20, Number of Positions=20, Number of Rows=2, Orientation=Straight, Packaging=Rail/Tube, PCB Mount Alignment="No (Without)", PCB Mounting Orientation=Vertical, PCB Mount Retention=Without, Pitch=2.54mm, REACH SVHC="No SVHC", Row Spacing=2.54mm, Shrouded="Yes (With)", Shrouded End Dimension=3.81mm, Supplier 1=Digi-Key, Termination="Through Hole", Voltage Rating=250V
Q1 Q3 Q5: library part MOSFET-P_PPAK, "MOSFET P-CH PPAK-8", Continuous Drain Current (ID)=16A, Gate to Source Voltage (Vgs)=20V, Manufacturer 1="Vishay Semiconductors", Manufacturer Part Number 1=SQS423EN-T1_GE3, Max Operating Temperature=175°C, Min Operating Temperature=-55°C, Power Dissipation=62.5W, Supplier Part Number 1=SQS423EN-T1_GE3CT-ND, ComponentLink1Description=https://datasheet.ciiva.com/26133/sqs423en-26133606.pdf?src-supplier=Avnet+Europe, ComponentLink1URL=https://datasheet.ciiva.com/26133/sqs423en-26133606.pdf?src-supplier=Avnet+Europe, ComponentLink2Description=https://datasheet.ciiva.com/11160/sqs423en-11160394.pdf?src-supplier=Avnet, ComponentLink2URL=https://datasheet.ciiva.com/11160/sqs423en-11160394.pdf?src-supplier=Avnet, Fall Time=15ns, Mount="Surface Mount", Number of Elements=1, Number of Pins=8, Packaging="Tape and Reel", Radiation Hardening=No, Rise Time=43ns, Supplier 1=Digi-Key, Turn-Off Delay Time=23ns, Turn-On Delay Time=65ns
Q2 Q4 Q6: library part PMBT2222, "TRANS NPN SW 600MA 40V SOT23", Manufacturer 1=Nexperia, Manufacturer Part Number 1=PMBT2222A,215, Supplier Part Number 1=1727-2956-1-ND, ComponentLink1Description=http://www.farnell.com/datasheets/1274664.pdf?src-supplier=Farnell, ComponentLink1URL=http://www.farnell.com/datasheets/1274664.pdf?src-supplier=Farnell, Supplier 1=Digi-Key
R1 R4 R5 R8 R9 R12 R13 R14 R15 R16 R17: library part R, "RES 10.0K OHM 1/10W 1% 0402 SMD", Case/Package=0402, Case Code (Metric)=1005, Manufacturer 1=Panasonic, Manufacturer Part Number 1=ERJ-2RKF1002X, Max Operating Temperature=155°C, Max Power Dissipation=100mW, Min Operating Temperature=-55°C, Package Quantity=1, Resistance=10kR, Supplier Part Number 1=P10.0KLCT-ND, Temperature Coefficient=100ppm/°C, Tolerance=1%, Voltage Rating=50V, Case Code (Imperial)=0402, ComponentLink1Description=https://datasheet.ciiva.com/11821/0900766b80f80784-11821171.pdf?src-supplier=RSComponents, ComponentLink1URL=https://datasheet.ciiva.com/11821/0900766b80f80784-11821171.pdf?src-supplier=RSComponents, ComponentLink2Description=https://datasheet.ciiva.com/17212/aoa0000ce2-17212102.pdf?src-supplier=Avnet+Europe, ComponentLink2URL=https://datasheet.ciiva.com/17212/aoa0000ce2-17212102.pdf?src-supplier=Avnet+Europe, ComponentLink3Description=https://datasheet.ciiva.com/28514/1678782-28514185.pdf?src-supplier=Element14, ComponentLink3URL=https://datasheet.ciiva.com/28514/1678782-28514185.pdf?src-supplier=Element14, ComponentLink4Description=https://datasheet.ciiva.com/43467/1678782-43467402.pdf?src-supplier=Farnell, ComponentLink4URL=https://datasheet.ciiva.com/43467/1678782-43467402.pdf?src-supplier=Farnell, ComponentLink5Description=https://datasheet.ciiva.com/27055/1987020-27055643.pdf?src-supplier=Jameco, ComponentLink5URL=https://datasheet.ciiva.com/27055/1987020-27055643.pdf?src-supplier=Jameco, ComponentLink6Description=https://datasheet.ciiva.com/48531/aoa0000ce2-48531069.pdf?src-supplier=Avnet, ComponentLink6URL=https://datasheet.ciiva.com/48531/aoa0000ce2-48531069.pdf?src-supplier=Avnet, ComponentLink7Description=https://datasheet.ciiva.com/30201/aoa0000ce2-30201022.pdf?src-supplier=Onlinecomponents.com, ComponentLink7URL=https://datasheet.ciiva.com/30201/aoa0000ce2-30201022.pdf?src-supplier=Onlinecomponents.com, ComponentLink8Description=https://datasheet.ciiva.com/16199/aoa0000ce2-16199478.pdf?src-supplier=Future+Electronics, ComponentLink8URL=https://datasheet.ciiva.com/16199/aoa0000ce2-16199478.pdf?src-supplier=Future+Electronics, ComponentLink9Description=https://datasheet.ciiva.com/24023/aoa0000ce2-24023017.pdf?src-supplier=Mouser, ComponentLink9URL=https://datasheet.ciiva.com/24023/aoa0000ce2-24023017.pdf?src-supplier=Mouser, ComponentLink10Description=https://datasheet.ciiva.com/9194/aoa0000ce2-9194142.pdf?src-supplier=Avnet, ComponentLink10URL=https://datasheet.ciiva.com/9194/aoa0000ce2-9194142.pdf?src-supplier=Avnet, ComponentLink11Description=https://datasheet.ciiva.com/16782/70260748-16782590.pdf?src-supplier=Allied+Electronics, ComponentLink11URL=https://datasheet.ciiva.com/16782/70260748-16782590.pdf?src-supplier=Allied+Electronics, ComponentLink12Description=https://datasheet.ciiva.com/16786/70260748-16786734.pdf?src-supplier=Allied+Electronics, ComponentLink12URL=https://datasheet.ciiva.com/16786/70260748-16786734.pdf?src-supplier=Allied+Electronics, Composition="Thick Film", Contact Plating=Tin, Depth=0.5mm, Features="Automotive AEC-Q200", Height=0.35mm, Lead Free="Lead Free", Length=1mm, Military Standard=Not, Mount="Surface Mount", Number of Pins=2, Number of Terminations=2, Packaging="Tape and Reel", Power Rating=100mW, Radiation Hardening=No, REACH SVHC="No SVHC", Supplier 1=Digi-Key, Termination=SMD/SMT, Voltage Rating (DC)=50V, Width=0.02inch
R2 R6 R10: library part R, "RES 12.0K OHM 1/10W 1% 0402 SMD", Case/Package=0402, Case Code (Metric)=1005, Manufacturer 1=Panasonic, Manufacturer Part Number 1=ERJ-2RKF1202X, Max Operating Temperature=155°C, Max Power Dissipation=100mW, Min Operating Temperature=-55°C, Package Quantity=1, Resistance=12kR, Supplier Part Number 1=P12.0KLCT-ND, Temperature Coefficient=100ppm/°C, Tolerance=1%, Voltage Rating=50V, Case Code (Imperial)=0402, ComponentLink1Description=https://datasheet.ciiva.com/7944/426256-7944939.pdf?src-supplier=Element14, ComponentLink1URL=https://datasheet.ciiva.com/7944/426256-7944939.pdf?src-supplier=Element14, ComponentLink2Description=https://datasheet.ciiva.com/7944/aoa0000ce2-7944604.pdf?src-supplier=Element14, ComponentLink2URL=https://datasheet.ciiva.com/7944/aoa0000ce2-7944604.pdf?src-supplier=Element14, ComponentLink3Description=https://datasheet.ciiva.com/22673/1678782-22673676.pdf?src-supplier=Element14, ComponentLink3URL=https://datasheet.ciiva.com/22673/1678782-22673676.pdf?src-supplier=Element14, ComponentLink4Description=https://datasheet.ciiva.com/46373/1678782-46373164.pdf?src-supplier=Element14, ComponentLink4URL=https://datasheet.ciiva.com/46373/1678782-46373164.pdf?src-supplier=Element14, ComponentLink5Description=https://datasheet.ciiva.com/22687/1678782-22687405.pdf?src-supplier=Element14, ComponentLink5URL=https://datasheet.ciiva.com/22687/1678782-22687405.pdf?src-supplier=Element14, ComponentLink6Description=https://datasheet.ciiva.com/46373/1678782-46373165.pdf?src-supplier=Element14, ComponentLink6URL=https://datasheet.ciiva.com/46373/1678782-46373165.pdf?src-supplier=Element14, Composition="Thick Film", Contact Plating=Tin, Depth=0.5mm, Features="Automotive AEC-Q200", Height=0.35mm, Lead Free="Lead Free", Length=1mm, Military Standard=Not, Mount="Surface Mount", Number of Pins=2, Number of Terminations=2, Packaging="Tape and Reel", Power Rating=100mW, REACH SVHC="No SVHC", Supplier 1=Digi-Key, Termination=SMD/SMT, Voltage Rating (DC)=50V, Width=0.02inch
R3: library part R, "RES 1.00K OHM 1/10W 1% 0402 SMD", Case/Package=0402, Case Code (Metric)=1005, Manufacturer 1=Panasonic, Manufacturer Part Number 1=ERJ-2RKF1001X, Max Operating Temperature=155°C, Max Power Dissipation=100mW, Min Operating Temperature=-55°C, Package Quantity=1, Resistance=10kR, Supplier Part Number 1=P1.00KLCT-ND, Temperature Coefficient=100ppm/°C, Tolerance=1%, Voltage Rating=50V, Case Code (Imperial)=0402, ComponentLink1Description=https://datasheet.ciiva.com/11821/0900766b80f80784-11821171.pdf?src-supplier=RSComponents, ComponentLink1URL=https://datasheet.ciiva.com/11821/0900766b80f80784-11821171.pdf?src-supplier=RSComponents, ComponentLink2Description=https://datasheet.ciiva.com/17212/aoa0000ce2-17212102.pdf?src-supplier=Avnet+Europe, ComponentLink2URL=https://datasheet.ciiva.com/17212/aoa0000ce2-17212102.pdf?src-supplier=Avnet+Europe, ComponentLink3Description=https://datasheet.ciiva.com/28514/1678782-28514185.pdf?src-supplier=Element14, ComponentLink3URL=https://datasheet.ciiva.com/28514/1678782-28514185.pdf?src-supplier=Element14, ComponentLink4Description=https://datasheet.ciiva.com/43467/1678782-43467402.pdf?src-supplier=Farnell, ComponentLink4URL=https://datasheet.ciiva.com/43467/1678782-43467402.pdf?src-supplier=Farnell, ComponentLink5Description=https://datasheet.ciiva.com/27055/1987020-27055643.pdf?src-supplier=Jameco, ComponentLink5URL=https://datasheet.ciiva.com/27055/1987020-27055643.pdf?src-supplier=Jameco, ComponentLink6Description=https://datasheet.ciiva.com/48531/aoa0000ce2-48531069.pdf?src-supplier=Avnet, ComponentLink6URL=https://datasheet.ciiva.com/48531/aoa0000ce2-48531069.pdf?src-supplier=Avnet, ComponentLink7Description=https://datasheet.ciiva.com/30201/aoa0000ce2-30201022.pdf?src-supplier=Onlinecomponents.com, ComponentLink7URL=https://datasheet.ciiva.com/30201/aoa0000ce2-30201022.pdf?src-supplier=Onlinecomponents.com, ComponentLink8Description=https://datasheet.ciiva.com/16199/aoa0000ce2-16199478.pdf?src-supplier=Future+Electronics, ComponentLink8URL=https://datasheet.ciiva.com/16199/aoa0000ce2-16199478.pdf?src-supplier=Future+Electronics, ComponentLink9Description=https://datasheet.ciiva.com/24023/aoa0000ce2-24023017.pdf?src-supplier=Mouser, ComponentLink9URL=https://datasheet.ciiva.com/24023/aoa0000ce2-24023017.pdf?src-supplier=Mouser, ComponentLink10Description=https://datasheet.ciiva.com/9194/aoa0000ce2-9194142.pdf?src-supplier=Avnet, ComponentLink10URL=https://datasheet.ciiva.com/9194/aoa0000ce2-9194142.pdf?src-supplier=Avnet, ComponentLink11Description=https://datasheet.ciiva.com/16782/70260748-16782590.pdf?src-supplier=Allied+Electronics, ComponentLink11URL=https://datasheet.ciiva.com/16782/70260748-16782590.pdf?src-supplier=Allied+Electronics, ComponentLink12Description=https://datasheet.ciiva.com/16786/70260748-16786734.pdf?src-supplier=Allied+Electronics, ComponentLink12URL=https://datasheet.ciiva.com/16786/70260748-16786734.pdf?src-supplier=Allied+Electronics, ComponentLink13Description=https://datasheet.ciiva.com/11821/0900766b80f80784-11821203.pdf?src-supplier=RSComponents, ComponentLink13URL=https://datasheet.ciiva.com/11821/0900766b80f80784-11821203.pdf?src-supplier=RSComponents, ComponentLink14Description=https://datasheet.ciiva.com/16767/70260748-16767559.pdf?src-supplier=Allied+Electronics, ComponentLink14URL=https://datasheet.ciiva.com/16767/70260748-16767559.pdf?src-supplier=Allied+Electronics, ComponentLink15Description=https://datasheet.ciiva.com/9198/aoa0000ce2-9198920.pdf?src-supplier=Avnet, ComponentLink15URL=https://datasheet.ciiva.com/9198/aoa0000ce2-9198920.pdf?src-supplier=Avnet, ComponentLink16Description=https://datasheet.ciiva.com/7942/aoa0000ce2-7942426.pdf?src-supplier=Element14, ComponentLink16URL=https://datasheet.ciiva.com/7942/aoa0000ce2-7942426.pdf?src-supplier=Element14, ComponentLink17Description=https://datasheet.ciiva.com/16523/aoa0000ce2-16523834.pdf?src-supplier=Avnet+Asia, ComponentLink17URL=https://datasheet.ciiva.com/16523/aoa0000ce2-16523834.pdf?src-supplier=Avnet+Asia, ComponentLink18Description=https://datasheet.ciiva.com/16771/70260748-16771979.pdf?src-supplier=Allied+Electronics, ComponentLink18URL=https://datasheet.ciiva.com/16771/70260748-16771979.pdf?src-supplier=Allied+Electronics, ComponentLink19Description=https://datasheet.ciiva.com/17215/aoa0000ce2-17215308.pdf?src-supplier=Avnet+Europe, ComponentLink19URL=https://datasheet.ciiva.com/17215/aoa0000ce2-17215308.pdf?src-supplier=Avnet+Europe, ComponentLink20Description=https://datasheet.ciiva.com/22673/1678782-22673916.pdf?src-supplier=Element14, ComponentLink20URL=https://datasheet.ciiva.com/22673/1678782-22673916.pdf?src-supplier=Element14, ComponentLink21Description=https://datasheet.ciiva.com/28532/1678782-28532109.pdf?src-supplier=Element14, ComponentLink21URL=https://datasheet.ciiva.com/28532/1678782-28532109.pdf?src-supplier=Element14, Composition="Thick Film", Contact Plating=Tin, Depth=0.5mm, Features="Automotive AEC-Q200", Height=0.35mm, Lead Free="Lead Free", Length=1mm, Military Standard=Not, Mount="Surface Mount", Number of Pins=2, Number of Terminations=2, Packaging="Tape and Reel", Power Rating=100mW, Radiation Hardening=No, REACH SVHC="No SVHC", Supplier 1=Digi-Key, Termination=SMD/SMT, Voltage Rating (DC)=50V, Width=0.02inch, Working Voltage=50V
R7 R11: library part R, "RES 1.00K OHM 1/10W 1% 0402 SMD", Case/Package=0402, Case Code (Metric)=1005, Manufacturer 1=Panasonic, Manufacturer Part Number 1=ERJ-2RKF1001X, Max Operating Temperature=155°C, Max Power Dissipation=100mW, Min Operating Temperature=-55°C, Package Quantity=1, Resistance=1kR, Supplier Part Number 1=P1.00KLCT-ND, Temperature Coefficient=100ppm/°C, Tolerance=1%, Voltage Rating=50V, Case Code (Imperial)=0402, ComponentLink1Description=https://datasheet.ciiva.com/11821/0900766b80f80784-11821203.pdf?src-supplier=RSComponents, ComponentLink1URL=https://datasheet.ciiva.com/11821/0900766b80f80784-11821203.pdf?src-supplier=RSComponents, ComponentLink2Description=https://datasheet.ciiva.com/16767/70260748-16767559.pdf?src-supplier=Allied+Electronics, ComponentLink2URL=https://datasheet.ciiva.com/16767/70260748-16767559.pdf?src-supplier=Allied+Electronics, ComponentLink3Description=https://datasheet.ciiva.com/9198/aoa0000ce2-9198920.pdf?src-supplier=Avnet, ComponentLink3URL=https://datasheet.ciiva.com/9198/aoa0000ce2-9198920.pdf?src-supplier=Avnet, ComponentLink4Description=https://datasheet.ciiva.com/7942/aoa0000ce2-7942426.pdf?src-supplier=Element14, ComponentLink4URL=https://datasheet.ciiva.com/7942/aoa0000ce2-7942426.pdf?src-supplier=Element14, ComponentLink5Description=https://datasheet.ciiva.com/16523/aoa0000ce2-16523834.pdf?src-supplier=Avnet+Asia, ComponentLink5URL=https://datasheet.ciiva.com/16523/aoa0000ce2-16523834.pdf?src-supplier=Avnet+Asia, ComponentLink6Description=https://datasheet.ciiva.com/16771/70260748-16771979.pdf?src-supplier=Allied+Electronics, ComponentLink6URL=https://datasheet.ciiva.com/16771/70260748-16771979.pdf?src-supplier=Allied+Electronics, ComponentLink7Description=https://datasheet.ciiva.com/17215/aoa0000ce2-17215308.pdf?src-supplier=Avnet+Europe, ComponentLink7URL=https://datasheet.ciiva.com/17215/aoa0000ce2-17215308.pdf?src-supplier=Avnet+Europe, ComponentLink8Description=https://datasheet.ciiva.com/22673/1678782-22673916.pdf?src-supplier=Element14, ComponentLink8URL=https://datasheet.ciiva.com/22673/1678782-22673916.pdf?src-supplier=Element14, ComponentLink9Description=https://datasheet.ciiva.com/28532/1678782-28532109.pdf?src-supplier=Element14, ComponentLink9URL=https://datasheet.ciiva.com/28532/1678782-28532109.pdf?src-supplier=Element14, Composition="Thick Film", Contact Plating=Tin, Depth=0.5mm, Features="Automotive AEC-Q200", Height=0.35mm, Lead Free="Lead Free", Length=1mm, Military Standard=Not, Mount="Surface Mount", Number of Pins=2, Number of Terminations=2, Packaging="Tape and Reel", Power Rating=100mW, Radiation Hardening=No, REACH SVHC="No SVHC", Supplier 1=Digi-Key, Termination=SMD/SMT, Voltage Rating (DC)=50V, Width=0.5mm, Working Voltage=50V